# Altium PCB CartReader_1.0_Minimal.PcbDoc
Units mm, origin at the board's own origin, x right, y up, seen from the top; angles counter-clockwise.
Board outline 82.8 x 50 mm, 2 copper layers (Top Layer, Bottom Layer), stack 1.62 mm thick; 58 components, 74 nets, 306 pads, 259 vias.
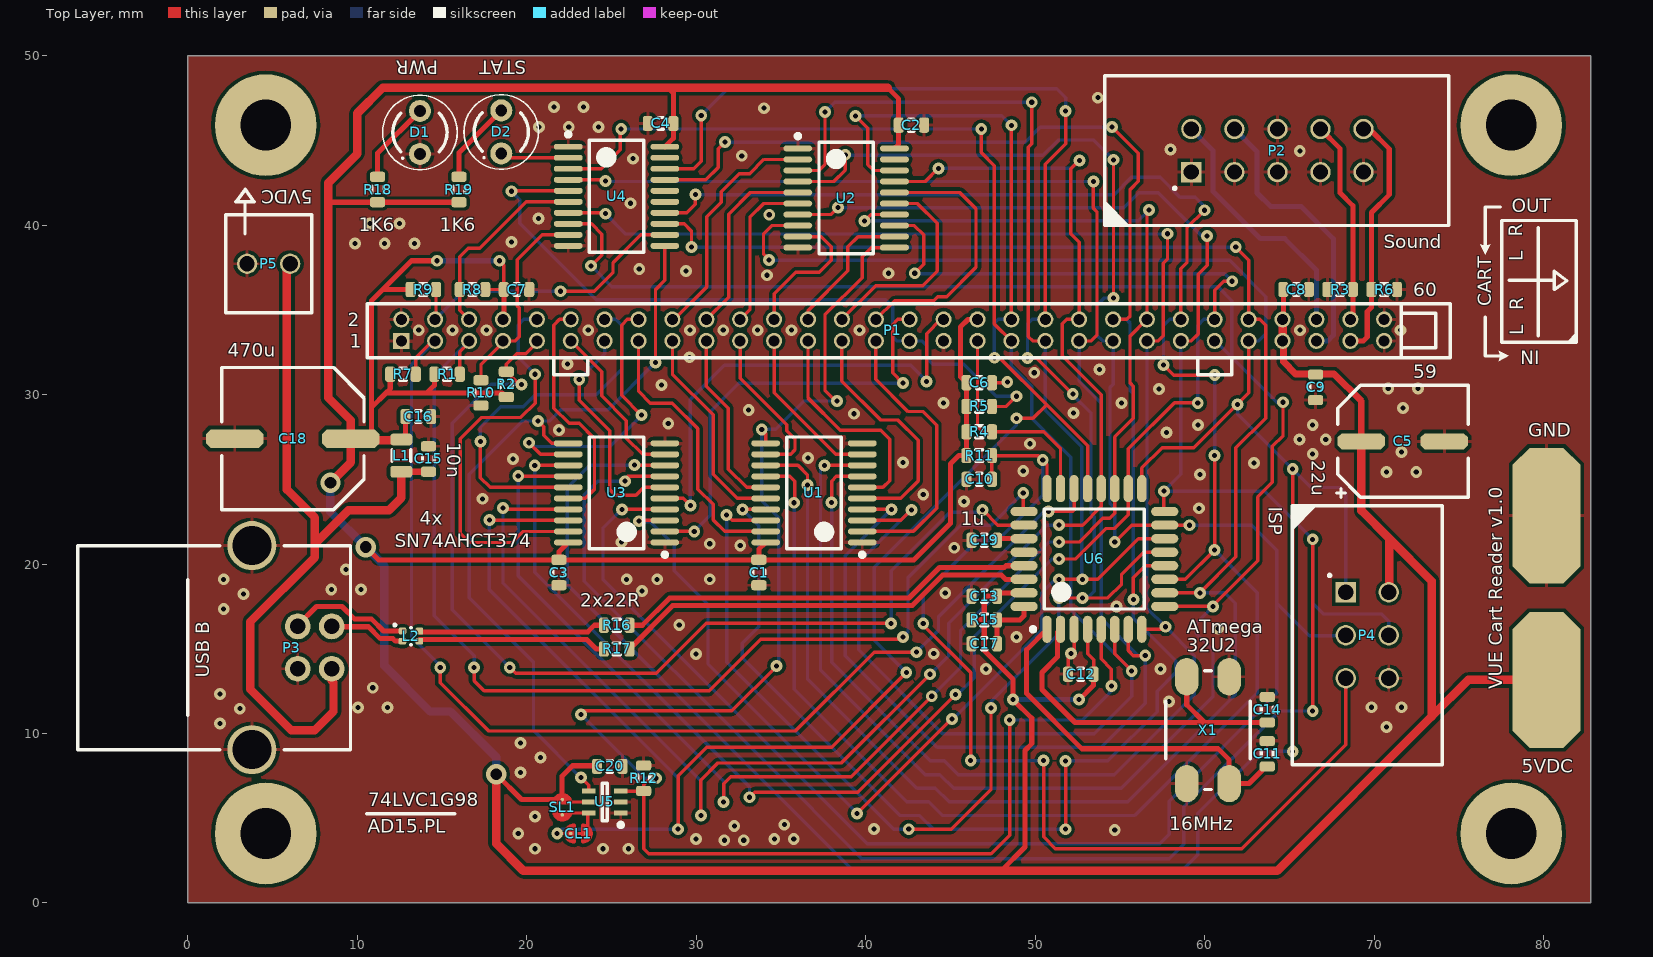
[diagram p0: Top Layer view]
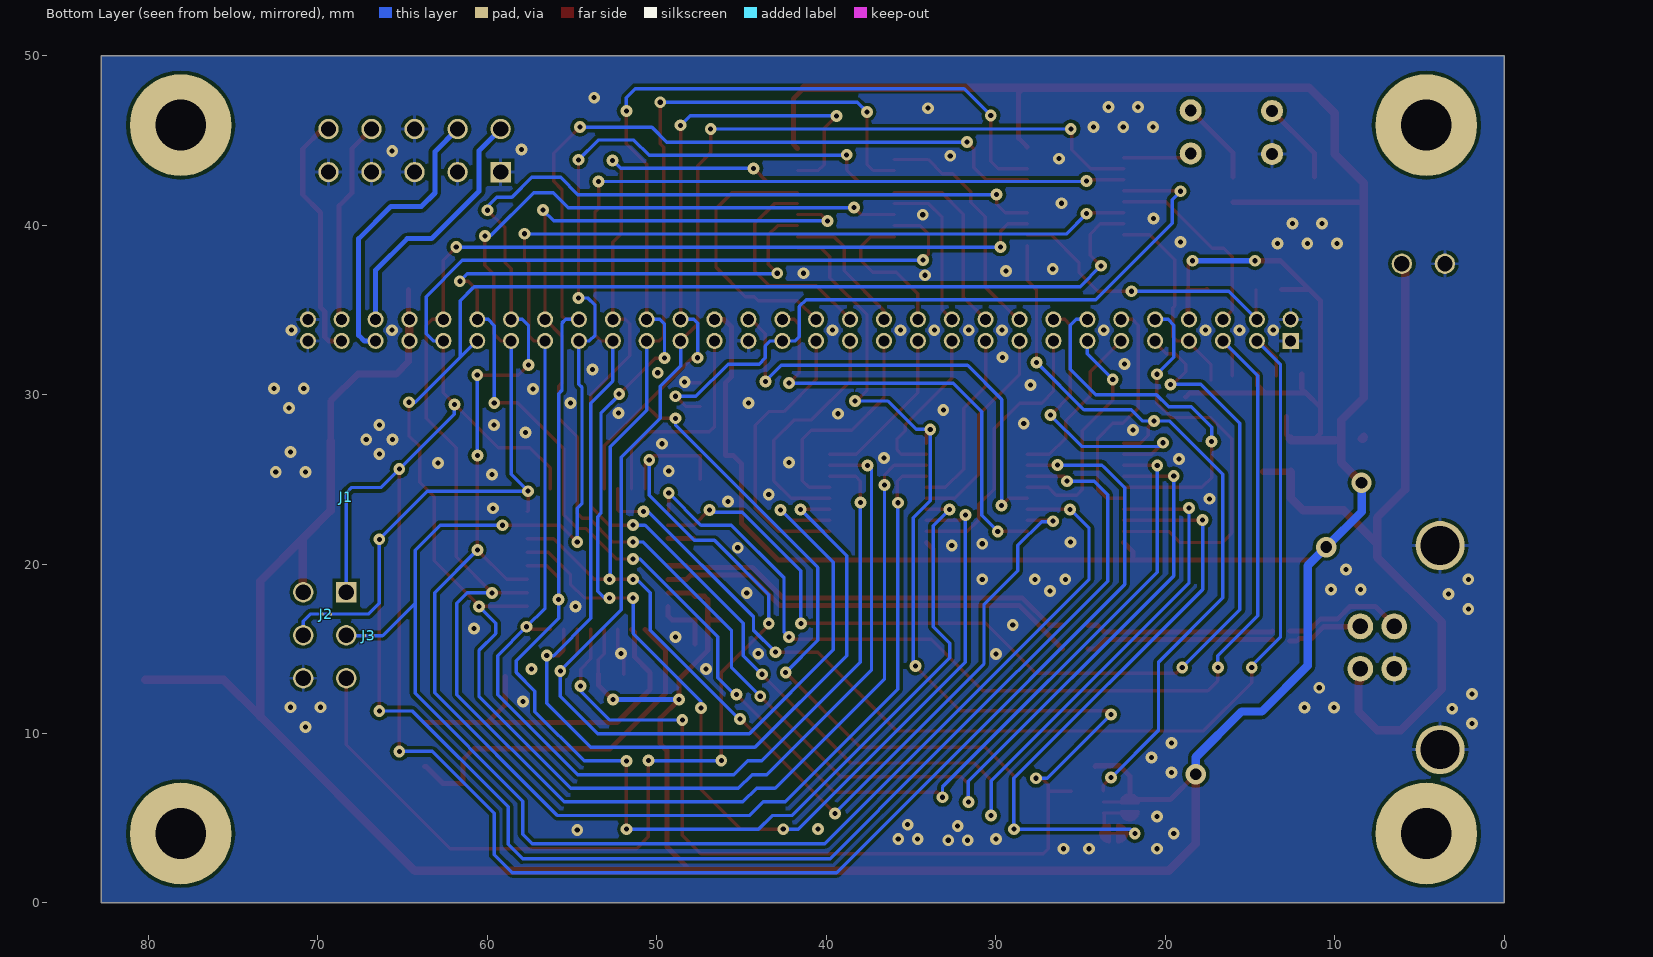
[diagram p1: Bottom Layer view, seen from below]

## Layer stack, top to bottom
Top Layer: signal copper 0.035
Dielectric: core 1.55, FR-4, Dk 4.8
Bottom Layer: signal copper 0.035

## Board outline
0,0 0,50 82.8,50 82.8,0

## Design rules (kind name [scope] priority, off if disabled: settings)
Clearance PolyClearance [IsRegion] p1: gap=0.2
Clearance DiffClearance [All] p2: gap=0.15
Clearance [All] p3: gap=0.2
ComponentClearance NetTie_Clearance [IsNetTieComponent] p1: gap=0 collisioncheckmode=3 verticalgap=0 showdistances=FALSE
ComponentClearance [All] p2: gap=0.2 collisioncheckmode=3 verticalgap=0.2 showdistances=FALSE
DiffPairsRouting [All] p1: maxlimit=0.2 minlimit=0.15 mostfreqgap=0.15 maxuncoupledlength=10
HoleSize PreferredHoleSize [All] p1: absolutevalues=TRUE maxlimit=5.5 minlimit=0.3 maxpercent=80.000 minpercent=20.000
HoleSize [All] p2: absolutevalues=TRUE maxlimit=5.5 minlimit=0.2 maxpercent=80.000 minpercent=20.000
HoleToHoleClearance HoleToHoleClearance_lt20 [HoleDiameter <= 2.0 vs HoleDiameter <= 2.0] p1: gap=0.4 allowstackedmicrovias=TRUE
HoleToHoleClearance HoleToHoleClearance_gt20 [All vs HoleDiameter > 2.0] p2: gap=0.5 allowstackedmicrovias=TRUE
MatchedLengths [IsDifferentialPair] p1: tolerance=1 checknetsindiffpair=TRUE checkdiffpairvsdiffpair=FALSE checkothers=TRUE
MinimumAnnularRing MinimumAnnularRing_Fix [All] p1: minimumring=0.15
MinimumAnnularRing [All] p2: minimumring=0.2
MinimumSolderMaskSliver [All] p1: minsoldermaskwidth=0.1
PlaneClearance [All] p1: clearance=0.5
PlaneConnect [All] p1: planeconnectstyle=Relief reliefexpansion=0.5 reliefentries=2 reliefconductorwidth=0.2 reliefairgap=0.2
PolygonConnect Power_VIAs [IsVia and InNetClass('PWR') and SolderMaskTentingBottom and SolderMaskTentingTop] p1: connectstyle=Direct reliefconductorwidth=0.254 reliefentries=4 polygonreliefangle="90 Angle" airgapwidth=0.254
PolygonConnect [All] p2: connectstyle=Relief reliefconductorwidth=0.2 reliefentries=4 polygonreliefangle="90 Angle" airgapwidth=0.2
RoutingCorners [All] p1: cornerstyle=45-Degree minsetback=2 maxsetback=2
RoutingVias [All] p1: holewidth=0.3 width=0.7 viastyle="Through Hole" minholewidth=0.2 minwidth=0.6 maxholewidth=5.5 maxwidth=5.9
SilkToSilkClearance [All] p1: silktosilkclearance=0.2
SilkscreenOverComponentPads [All] p1: minsilkscreentomaskgap=0.2
SolderMaskExpansion [All] p1: expansion=0.1
Width Width_PWR [InNetClass('PWR')] p1: maxlimit=0.5 minlimit=0.2 preferedwidth=0.3
Width [All] p2: maxlimit=0.4 minlimit=0.2 preferedwidth=0.2
18 further rules are at their usual default settings.

## Classes and differential pairs
component class System: C10 C11 C12 C13 C14 C15 C16 C17 C18 C19 C20 CL1 D1 D2 J1 J2 J3 L1 L2 P3 P4 P5 R11 R12 R15 R16 R17 R18 R19 SL1 U5 U6 X1
component class VUE_Connector: C1 C2 C3 C4 C5 C6 C7 C8 C9 P1 P2 R1 R2 R3 R4 R5 R6 R7 R8 R9 R10 U1 U2 U3 U4
net class PWR: GND NetC17_2 VBUS VCC5
differential pair D_IN_CHOKE: +D_IN_CHOKE_P -D_IN_CHOKE_N
differential pair D_IN: +D_IN_P -D_IN_N
differential pair D: +D_P -D_N

## Components (designator, comment, footprint, x,y, rotation, side; value= is the part's Value field where it differs from the comment)
C1 "100n" C0603 33.7,19.5 r90 top
C2 "100n" C0603 42.7,45.9 r180 top
C3 "100n" C0603 21.9,19.5 r90 top
C4 "100n" C0603 27.9,46 r0 top
C5 "22uF" CAPE66X66 71.7,27.24 r90 top
C6 "100n" C0603 46.7,30.7 r180 top
C7 "100n" C0603 19.4,36.2 r180 top
C8 "100n" C0603 65.4,36.2 r180 top
C9 "100n" C0603 66.55,30.43 r90 top
C10 "100n" C0603 46.7,25 r0 top
C11 "22p" C0603 63.7,8.8 r270 top
C12 "100n" C0603 52.7,13.5 r0 top
C13 "100n" C0603 47,18.1 r0 top
C14 "22p" C0603 63.7,11.4 r270 top
C15 "10n" C0603 14.2,26.2 r270 top
C16 "100n" C0603 13.6,28.7 r180 top
C17 "100n" C0603 47,15.3 r0 top
C18 "470u" C8.3x8.3mm 6.2,27.4 r270 top
C19 "1u" C0603 47,21.4 r0 top
C20 "100n" C0603 24.9,8.06 r180 top
CL1 "Cuttable Link" CuttableLink 23.3,4.1 r180 top net-tie
D1 "L-934LG" L-934LX 13.7,45.47 r90 top
D2 "L-934LI" L-934LX 18.5,45.5 r90 top
J1 "0.2mm" NETTIE_02MM 68.34,23.69 r90 bottom net-tie
J2 "0.2mm" NETTIE_02MM 69.76,17.05 r180 bottom net-tie
J3 "0.2mm" NETTIE_02MM 67.26,15.78 r180 bottom net-tie
L1 "BMB2A1000LN2" IND0805 12.6,26.4 r90 top
L2 "DLP11SN900HL2L" 0504 13.17,15.75 r0 top
P1 "GEC_RECEPTABLE" GEC_RECEPTACLE 41.6,33.8 r0 top
P2 "Header 2x5" GARRY_WSL-XG-10 64.3,44.4 r0 top
P3 "USB B Socket" USB_B_SOCKET 1.57,15.07 r270 top
P4 "Header 2x3" GARRY_WSL-XG-6 69.6,15.8 r270 top
P5 "Header 1x2" IMP_PSS254/2G 4.77,37.72 r180 top
R1 "open" R0603 15.3,31.2 r180 top
R2 "10k" R0603 18.8,30.6 r270 top
R3 "10k" R0603 68,36.2 r0 top
R4 "open" R0603 46.7,27.8 r180 top
R5 "10k" R0603 46.7,29.3 r180 top
R6 "10k" R0603 70.6,36.2 r180 top
R7 "10k" R0603 12.7,31.2 r180 top
R8 "open" R0603 16.8,36.2 r0 top
R9 "open" R0603 13.9,36.2 r180 top
R10 "10k" R0603 17.3,30.1 r90 top
R11 "10k" R0603 46.7,26.4 r180 top
R12 "10k" R0603 26.9,7.36 r270 top
R15 "10k" R0603 47,16.7 r180 top
R16 "22R" R0603 25.31,16.39 r180 top
R17 "22R" R0603 25.31,14.99 r180 top
R18 "1k6" R0603 11.2,42.1 r270 top
R19 "1k6" R0603 16,42.1 r270 top
SL1 "Solderable Link" SolderableLink 22.1,5.4 r90 top
U1 "SN74AHCT374PW" TSOP65P640X120-20N 36.95,24.2 r180 top
U2 "SN74AHCT374PW" TSOP65P640X120-20N 38.85,41.6 r0 top
U3 "SN74AHCT374PW" TSOP65P640X120-20N 25.3,24.2 r180 top
U4 "SN74AHCT374PW" TSOP65P640X120-20N 25.3,41.7 r0 top
U5 "74LVC1G98DW-7" SOT65P210X110-6N 24.6,5.96 r180 top
U6 "ATmega32U2" TQFP80P900X900X120-32N 53.5,20.3 r90 top
X1 "16 MHz" OSCC700X500X120A 60.2,10.2 r90 top

## Footprints (in the part's own frame and the unit in brackets; to place one, negate y for a bottom-side part, rotate by r counter-clockwise, add the part's x,y. Pads: shape width x height; smd on the part's side, far side on the other; paste and mask are expansions set on the pad)
0504 [mm] "Choke1210x90"
  rrect50% 0.45x0.4 smd: 1(-0.5,0.3) 2(0.5,0.3) 3(0.5,-0.3) 4(-0.5,-0.3)
  silkscreen extent -1,-0.5 0.01,0.7, body extent -0.6,-0.5 0.6,0.5, height 0.9
C8.3x8.3mm [mm] "CAPAE80X80"
  oct 1.1x3.4 smd: 1(0,3.425) 2(0,-3.425)
  silkscreen extent -4.2,-4.2 4.2,4.2, body extent -4.23,-4.23 4.25,4.2, height 10.7
C0603 [mm] "CAPC1608X90 - Original Description: Chip Capacitor; Body 1.0 x 0.5 mm [0603]"
  rrect50% 0.6x0.9 smd: 1(-0.75,0) 2(0.75,0)
  silkscreen extent -0.15,-0.35 0.15,0.35, body extent -0.8,-0.4 0.8,0.4, height 0.9
CAPE66X66 [mm]
  oct 0.95x2.8 smd: 1(0,2.45) 2(0,-2.45)
  silkscreen extent -3.3,-3.86 3.3,3.9, body extent -3.3,-3.86 3.3,3.85, height 5.5
CuttableLink [mm]
  round 0.2 smd paste-0.1: 1(-0.2,0) 2(0.7,0)
  Top Layer region: 0.5,0.5 0.717,0.45 0.891,0.312 0.987,0.111 0.987,-0.111 0.891,-0.312 0.717,-0.45 0.5,-0.5 0.5,-0.5
  Top Layer region: 0,-0.5 -0.217,-0.45 -0.391,-0.312 -0.487,-0.111 -0.487,0.111 -0.391,0.312 -0.217,0.45 0,0.5 0,0.5
  Top Layer lines w0.2: 0.5,0 0,0 ; 0.5,0.5 cw(c0.5,0) 0.5,-0.5 0.5,0.5 ; 0,0.5 ccw(c0,0) 0,-0.5 0,0.5
GARRY_WSL-XG-6 [mm]
  rect 1.2x1.2 hole 0.9: 1(-2.54,-1.27)
  round 1.2 hole 0.9: 2(-2.54,1.27) 3(0,-1.27) 4(0,1.27) 5(2.54,-1.27) 6(2.54,1.27)
  silkscreen extent -7.64,-4.43 7.64,4.43, body extent -7.6,-4.4 7.6,4.4, height 10.2
GARRY_WSL-XG-10 [mm]
  rect 1.2x1.2 hole 0.9: 1(-5.08,-1.27)
  round 1.2 hole 0.9: 2(-5.08,1.27) 3(-2.54,-1.27) 4(-2.54,1.27) 5(0,-1.27) 6(0,1.27) 7(2.54,-1.27) 8(2.54,1.27) 9(5.08,-1.27) 10(5.08,1.27)
  silkscreen extent -10.18,-4.43 10.1,4.43, body extent -10.18,-4.43 10.1,4.43, height 10.2
GEC_RECEPTACLE [mm]
  rect 0.95x0.95 hole 0.65: 1(-29,-0.635)
  round 0.95 hole 0.65: 2(-29,0.635) 3(-27,-0.635) 4(-27,0.635) 5(-25,-0.635) 6(-25,0.635) 7(-23,-0.635) 8(-23,0.635) 9(-21,-0.635) 10(-21,0.635) 11(-19,-0.635) 12(-19,0.635) 13(-17,-0.635) 14(-17,0.635) 15(-15,-0.635) 16(-15,0.635) 17(-13,-0.635) 18(-13,0.635) 19(-11,-0.635) 20(-11,0.635) 21(-9,-0.635) 22(-9,0.635) 23(-7,-0.635) 24(-7,0.635) 25(-5,-0.635) 26(-5,0.635) 27(-3,-0.635) 28(-3,0.635) 29(-1,-0.635) 30(-1,0.635) 31(1,-0.635) 32(1,0.635) 33(3,-0.635) 34(3,0.635) 35(5,-0.635) 36(5,0.635) 37(7,-0.635) 38(7,0.635) 39(9,-0.635) 40(9,0.635) 41(11,-0.635) 42(11,0.635) 43(13,-0.635) 44(13,0.635) 45(15,-0.635) 46(15,0.635) 47(17,-0.635) 48(17,0.635) 49(19,-0.635) 50(19,0.635) 51(21,-0.635) 52(21,0.635) 53(23,-0.635) 54(23,0.635) 55(25,-0.635) 56(25,0.635) 57(27,-0.635) 58(27,0.635) 59(29,-0.635) 60(29,0.635)
  silkscreen extent -31,-2.64 32.9,1.57, body extent -31,-1.64 30,1.57, height 7.1
IMP_PSS254/2G [mm]
  round 1.2 hole 0.9: 1(-1.27,0) 2(1.27,0)
  silkscreen extent -2.54,-2.9 2.54,2.9, body extent -2.54,-2.9 2.54,2.9, height 10.9
IND0805 [mm] "INDC2012X135 - Original Description: Inductor; Body 2.0 x 1.2 mm [0805]"
  rrect50% 0.7x1.3 smd: 1(-0.95,0) 2(0.95,0)
  silkscreen extent -0.35,-0.55 0.35,0.55, body extent -1,-0.65 1,0.65, height 1.05
L-934LX [mm]
  round 1.3 hole 0.7: 1(-1.27,0) 2(1.27,0)
  silkscreen extent -2.2,-2.2 2.2,2.2
NETTIE_02MM [mm]
  round 0.2 smd paste+0 mask+0: 1(0,0) 2(0.5,0)
  Top Layer lines w0.2: 0,0 0.5,0
OSCC700X500X120A [mm]
  oval 2.2x1.4 smd: 1(-3.15,-1.25) 2(3.15,-1.25) 3(3.15,1.25) 4(-3.15,1.25)
  silkscreen extent -3.5,-2.5 3.5,2.5, body extent -3.5,-2.5 3.5,2.5, height 1.2
R0603 [mm] "RESC1608X55 - Original Description: Chip Resistor; Body 1.0 x 0.5 mm [0603]"
  rrect50% 0.6x0.9 smd: 1(-0.75,0) 2(0.75,0)
  silkscreen extent -0.2,-0.35 0.2,0.35, body extent -0.8,-0.4 0.8,0.4, height 0.55
SolderableLink [mm]
  round 0.2 smd paste-0.1: 1(-0.2,0) 2(0.7,0)
  Top Layer region: 0.5,0.5 0.717,0.45 0.891,0.312 0.987,0.111 0.987,-0.111 0.891,-0.312 0.717,-0.45 0.5,-0.5 0.5,-0.5
  Top Layer region: 0,-0.5 -0.217,-0.45 -0.391,-0.312 -0.487,-0.111 -0.487,0.111 -0.391,0.312 -0.217,0.45 0,0.5 0,0.5
  Top Layer lines w0.2: 0,0.5 ccw(c0,0) -0.09,-0.492 ccw(c0,0) 0,-0.5 0,0 0,0.5 ; 0.5,0.5 cw(c0.5,0) 0.7,0.458 cw(c0.5,0) 1,0.01 cw(c0.5,0) 1,0 cw(c0.5,0) 0.56,-0.496 cw(c0.5,0) 0.5,-0.5 0.5,0 0.5,0.5
SOT65P210X110-6N [mm] "SOT363, 6-Leads, Body 2.2x2.2mm (max), Pitch 0.65mm, IPC Medium Density"
  rect 0.8x0.3 smd: 1(-0.95,0.65) 2(-0.95,0) 3(-0.95,-0.65) 4(0.95,-0.65) 5(0.95,0) 6(0.95,0.65)
  silkscreen extent -1.08,-1.1 0.15,1.47, body extent -0.67,-1.1 0.67,1.1, height 1.1
TQFP80P900X900X120-32N [mm] "TQFP, 32-Leads, Body 9.0x9.0mm (max), Pitch 0.80mm, IPC Medium Density"
  oval 1.6x0.55 smd: 1(-4.15,2.8) 2(-4.15,2) 3(-4.15,1.2) 4(-4.15,0.4) 5(-4.15,-0.4) 6(-4.15,-1.2) 7(-4.15,-2) 8(-4.15,-2.8) 17(4.15,-2.8) 18(4.15,-2) 19(4.15,-1.2) 20(4.15,-0.4) 21(4.15,0.4) 22(4.15,1.2) 23(4.15,2) 24(4.15,2.8)
  oval 0.55x1.6 smd: 9(-2.8,-4.15) 10(-2,-4.15) 11(-1.2,-4.15) 12(-0.4,-4.15) 13(0.4,-4.15) 14(1.2,-4.15) 15(2,-4.15) 16(2.8,-4.15) 25(2.8,4.15) 26(2,4.15) 27(1.2,4.15) 28(0.4,4.15) 29(-0.4,4.15) 30(-1.2,4.15) 31(-2,4.15) 32(-2.8,4.15)
  silkscreen extent -4.27,-2.95 2.95,3.75, body extent -3.5,-3.5 3.5,3.5, height 1.2
TSOP65P640X120-20N [mm] "TSOP, 20-Leads, Body 6.6x4.5mm (max), Pitch 0.65mm, IPC Medium Density"
  oval 1.7x0.35 smd: 1(-2.85,2.925) 2(-2.85,2.275) 3(-2.85,1.625) 4(-2.85,0.975) 5(-2.85,0.325) 6(-2.85,-0.325) 7(-2.85,-0.975) 8(-2.85,-1.625) 9(-2.85,-2.275) 10(-2.85,-2.925) 11(2.85,-2.925) 12(2.85,-2.275) 13(2.85,-1.625) 14(2.85,-0.975) 15(2.85,-0.325) 16(2.85,0.325) 17(2.85,0.975) 18(2.85,1.625) 19(2.85,2.275) 20(2.85,2.925)
  silkscreen extent -2.98,-3.3 1.6,3.77, body extent -2.25,-3.3 2.25,3.3, height 1.2
USB_B_SOCKET [mm]
  round 2.9 hole 2.3: 0(-6.02,2.213) 0(6.02,2.213)
  round 1.52 hole 0.92: 1(1.25,6.923) 2(-1.25,6.923) 3(-1.25,4.922) 4(1.25,4.922)
  silkscreen extent -6.02,-8.07 6.02,8.03

## Part data
C1 C2 C3 C4 C6 C7 C8 C9 C10 C12 C13 C16 C17 C20: library part 1168, "Ceramic Chip Capacitor"
C5: library part 1001
C11 C14: library part 1146, "Ceramic Chip Capacitor"
C15: library part 1162, "Ceramic Chip Capacitor"
C18: library part 1210, "Aluminum Electrolytic Capacitors"
C19: library part 1070, "Ceramic Chip Capacitor"
CL1: library part CuttableLink
D1: library part 3000, "Green Low-Current LED"
D2: library part 3002, "Red Low-Current LED"
J1 J2 J3: library part 6000
L1: library part 3003, "Chip Ferrit Bead Impedanz 1k"
L2: library part 3030, "SMD Common Mode Choke Coil"
P1: "VUE GEC_RECEPTABLE"
P2: library part 2008, "Shrouded Header 2x5"
P3: library part 2000
P4: library part 2005, "AVR In-System-Program Header 2x3"
P5: library part 2010, "Crimp Header Straight"
R1 R2 R3 R4 R5 R6 R7 R8 R9 R10 R11 R12 R15: library part 2471, "Resistor"
R16 R17: library part 2407, "Resistor"
R18 R19: library part 2452, "Resistor"
SL1: library part SolderableLink
U1 U2 U3 U4: library part 4003, "8x D Flip Flop w/ OE_N"
U5: library part 4004, "Configurable Multi-Function Logic Gate"
U6: library part 4001, "8-Bit AVR MCU,32KB Flash,USB Contr.,TQFP-32"
X1: library part 8000

## Free pads (board coordinates)
  round 6 hole 3: 0(4.6,4.1) 0(4.6,45.9) 0(78.1,4.1) 0(78.1,45.9)
  oct 4x8 smd mask-0.1: 0(80.18,13.16) 0(80.18,22.86)

## Via types
v1: diameter 0.7, hole 0.3, Top Layer to Bottom Layer, tented both sides, 256 vias
v2: diameter 1.2, hole 0.7, Top Layer to Bottom Layer, tented both sides, 3 vias

## Nets (pads, with @x,y where several pads share a name; then routed paths per layer and width w, separated by ;. In a path a pad name is that pad's centre, name@x,y a point inside that pad or via, vN(x,y) a via of type N, cw(c..) or ccw(c..) an arc to the next point about the centre after c; other vN are vias at no path point)
\ES: P1.4 R9.1 U4.12 | length 17.7
  Top Layer w0.2: P1.4 14.65,34.485 R9.1 ; v1(22,36.1) 23.975,36.1 25.094,37.219 25.094,37.794 26.725,39.425 U4.12
  Bottom Layer w0.2: P1.4 16.265,36.1 v1(22,36.1)
\INTCRO: P1.9 R2.1 U6.26 | length 61.5
  Top Layer w0.2: v1(19,13.9) 19.353,13.547 27.647,13.547 30.6,16.5 v1(41.5,16.5) ; v1(19.7,30.6) 19.55,30.6 R2.1 18.8,31.8 19.4,32.4 19.935,32.4 P1.9@20.6,33.065 ; v1(46.9,23.2) 47.8,22.3 U6.26
  Bottom Layer w0.2: v1(19,13.9) 15.6,17.3 15.6,28.3 17.9,30.6 v1(19.7,30.6) ; v1(41.5,16.5) 41.5,19.6 44.95,23.05 46.75,23.05 v1(46.9,23.2)
\OE: P1.35 R4.1 U6.23 | length 12.9
  Top Layer w0.2: P1.35 46.6,28.1 46.9,27.8 R4.1 50.5,27.8 51.5,26.8 U6.23
\PL: U3.11 U4.11 U5.4 | length 45.1
  Top Layer w0.2: v1(20.66,28.44) 21,28.1 21,27.6 21.475,27.125 U3.11 ; v1(23.2,7.4) 23.65,6.95 U5.4 ; v1(27.6,31.9) 27.6,36.2 28.15,36.75 U4.11
  Bottom Layer w0.2: v1(23.2,7.4) 20.4,10.2 20.4,14.2 16.6,18 16.6,25.3 19.74,28.44 v1(20.66,28.44) 21.34,28.44 22,29.1 24.8,29.1 v1(27.6,31.9)
\RAM_CS1: P1.6 R8.1 U4.6 | length 11.7
  Top Layer w0.2: P1.6 16.05,34.985 R8.1 16.05,38.125 16.55,38.625 17.225,38.625 19.975,41.375 U4.6
\RESET: C10.2 P4.5 R11.1 U6.24 | length 62.2
  Top Layer w0.2: v1(43.4,16.5) 43.4,16.4 46.2,13.6 v1(46.2,8.4) ; C10.2 R11.1 50.2,26.4 50.7,25.9 U6.24 ; v1(50.5,8.4) 50.5,3.9 51.2,3.2 62.2,3.2 68.33,9.33 P4.5
  Bottom Layer w0.2: v1(43.4,16.5) 43.4,18.2 46.6,21.4 47.8,21.4 50.45,24.05 v1(50.45,26.15) ; v1(46.2,8.4) v1(50.5,8.4)
\ROM_CE: P1.31 R5.1 U4.5 | length 42.2
  Top Layer w0.2: v1(19.1,42) 19.125,42.025 U4.5 ; R5.1 48.3,29.3 v1(48.9,29.9)
  Bottom Layer w0.2: v1(19.1,42) 19.6,41.5 19.6,40.1 24.1,35.6 41.2,35.6 41.6,35.2 41.6,33.4 41.835,33.165 P1.31 43.305,33.165 43.6,32.87 43.6,32.165 43.965,31.8 45.8,31.8 47.7,29.9 v1(48.9,29.9)
\RST: P1.5 R1.1 U6.25 | length 64.6
  Top Layer w0.2: R1.1@16.05,31.1 16.05,32.515 P1.5@16.6,33.065 ; v1(16.9,13.9) 16.9,13.1 17.48,12.52 30.77,12.52 33.82,15.57 42.07,15.57 v1(42.2,15.7) ; v1(49.3,24.2) 49.3,23.15 U6.25
  Bottom Layer w0.2: P1.5 14.55,31.115 14.55,16.95 16.9,14.6 v1(16.9,13.9) ; v1(42.2,15.7) 42.5,16 42.5,19.2 45.6,22.3 47.4,22.3 v1(49.3,24.2)
\WE: P1.3 R7.1 U6.22 | length 69.6
  Top Layer w0.2: R7.1@13.45,31.1 13.45,32.17 14.345,33.065 P1.3@14.6,33.065 ; v1(14.9,13.9) 14.9,13 17.75,10.15 35.86,10.15 40.51,14.8 v1(43,14.8) ; v1(50.8,23.1) 52.2,23.1 52.3,23.2 U6.22
  Bottom Layer w0.2: P1.3 13.2,31.765 13.2,15.7 v1@14.9,14 ; v1(43,14.8) 44.3,16.1 44.3,16.9 50.5,23.1 v1(50.8,23.1)
A0: P1.29 U1.2 | length 16.9
  Top Layer w0.2: U1.2 42.825,21.925 44.2,23.3 44.2,28.2 43.4,29 42.5,29 40.6,30.9 P1.29
A1: P1.27 U1.5 | length 14.4
  Top Layer w0.2: P1.27 38.6,30.8 40.9,28.5 41.9,28.5 43.1,27.3 43.1,24.9 42.075,23.875 U1.5
A2: P1.25 U1.6 | length 13.4
  Top Layer w0.2: P1.25 36.6,29.8 38.5,27.9 40.9,27.9 41.425,27.375 41.425,24.925 41.025,24.525 U1.6
A3: P1.23 U1.9 | length 9.8
  Top Layer w0.2: P1.23 34.6,30.1 38.225,26.475 U1.9
A4: P1.21 U1.12 | length 9.6
  Top Layer w0.2: P1.21 32.6,30.96 35.35,28.21 35.35,27.87 35.83,27.39 35.83,26.73 35.575,26.475 U1.12
A5: P1.19 U1.15 | length 10.7
  Top Layer w0.2: P1.19 30.6,30.5 31.9,29.2 31.9,25.6 32.975,24.525 U1.15
A6: P1.17 U1.16 | length 12.5
  Top Layer w0.2: P1.17 28.6,31.2 31,28.8 31,25.3 32.425,23.875 U1.16
A7: P1.15 U1.19 | length 16.5
  Top Layer w0.2: P1.15 26.6,30.2 27.3,29.5 28.6,29.5 30.1,28 30.1,24.419 31,23.519 31,22.6 31.675,21.925 U1.19
A8: P1.18 U2.2 | length 14.1
  Top Layer w0.2: P1.18 28.71,34.435 30.625,36.35 30.625,40.5 31.469,41.344 31.469,41.969 32.531,43.031 33.156,43.031 34,43.875 U2.2
A9: P1.20 U2.5 | length 11.4
  Top Layer w0.2: P1.20 30.61,34.435 31.925,35.75 31.925,40.65 33.2,41.925 U2.5
A10: P1.22 U2.6 | length 9.4
  Top Layer w0.2: P1.22 33.175,35.01 33.175,40.475 33.975,41.275 U2.6
A11: P1.24 U2.9 | length 8.7
  Top Layer w0.2: P1.24 34.6,35.95 35.875,37.225 37.275,37.225 37.975,37.925 37.975,38.725 37.375,39.325 U2.9
A12: P1.26 U2.12 | length 8.3
  Top Layer w0.2: P1.26 36.6,34.95 38.95,37.3 38.95,38.725 39.55,39.325 U2.12
A13: P1.28 U2.15 | length 12.6
  Top Layer w0.2: P1.28 40.585,36.42 43.36,36.42 44.23,37.29 44.23,40.1 43.055,41.275 U2.15
A14: P1.30 U2.16 | length 15.9
  Top Layer w0.2: P1.30 41.705,35.54 44.01,35.54 44.25,35.78 44.79,35.78 46.51,37.5 46.51,40.98 45.565,41.925 U2.16
A15: P1.32 U3.2 | length 26.1
  Top Layer w0.2: U3.2 v1(29.885,21.925) ; v1(42.2,30.68) 41.59,31.29 41.59,34.12 41.905,34.435 P1.32
  Bottom Layer w0.2: v1(29.885,21.925) 30.83,22.87 30.83,29 32.51,30.68 v1(42.2,30.68)
A16: P1.34 U3.5 | length 27.3
  Top Layer w0.2: U3.5 29.245,23.875 v1(29.66,23.46) ; v1(43.6,30.78) 43.6,33.6 44.435,34.435 P1.34
  Bottom Layer w0.2: v1(29.66,23.46) 29.66,29.71 31.67,31.72 42.66,31.72 v1(43.6,30.78)
A17: P1.13 U3.6 | length 13.7
  Top Layer w0.2: v1(23.1,30.9) 23.1,29.666 24.89,27.876 24.89,24.4 25.22,24.07 26.45,24.07 26.905,24.525 U3.6
  Bottom Layer w0.2: v1(23.1,30.9) 24.6,32.4 P1.13
A18: P1.11 U3.9 | length 9.8
  Top Layer w0.2: P1.11 24.42,31.345 24.42,29.92 25.88,28.46 25.88,27.43 26.835,26.475 U3.9
A19: P1.16 U3.12 | length 17.1
  Top Layer w0.2: v1(20.13,27.16) 20.815,26.475 U3.12 ; P1.16 25.935,34.435 25.6,34.1 25.6,29.95 26.76,28.79 v1(26.78,28.79)
  Bottom Layer w0.2: v1(20.13,27.16) 20.35,26.94 24.93,26.94 v1(26.78,28.79)
A20: P1.14 U3.15 | length 21.9
  Top Layer w0.2: v1(17.27,27.23) 17.27,25.1 17.845,24.525 U3.15
  Bottom Layer w0.2: v1(17.27,27.23) 17.27,28.08 18.47,29.28 19.8,29.28 20.52,30 24.1,30 25.6,31.5 25.6,34.1 25.265,34.435 P1.14
A21: P1.12 U3.16 | length 13.9
  Top Layer w0.2: U3.16 23.455,23.875 24,24.42 24,27.4 23.1,28.3 22.5,28.3 21.6,29.2 21.6,34.1 21.935,34.435 P1.12
A22: P1.10 U3.19 | length 24
  Top Layer w0.2: v1(20.5,31.2) 20.5,29.5 19.65,28.65 17.34,28.65 16.08,27.39 16.08,21.83 16.64,21.27 19.12,21.27 19.77,21.92 22.445,21.92 U3.19
  Bottom Layer w0.2: v1(20.5,31.2) 19.5,32.2 19.5,34.1 19.835,34.435 P1.10
AD0: P1.37 U1.3 U4.3 U6.6 | length 97.9
  Top Layer w0.2: U4.3 24.4,43.325 25.525,44.45 v1@25.525,45.725 ; U1.3 42.075,22.575 v1(42.7,23.2) ; v1(46.825,45.675) 46.825,44.285 47.6,43.51 47.6,34.165 P1.37 ; U6.6 54.7,14.7 v1(55.7,13.7)
  Bottom Layer w0.2: v1(25.575,45.675) v1(46.825,45.675) ; v1(42.7,23.2) 39.6,20.1 39.6,14.934 44.534,10 ; 44.534,9.994 53.5,9.994 55.7,12.194 v1(55.7,13.7) 52.1,17.3 52.1,26.3 49.8,28.6 49.8,30.5 48.6,31.7 P1.37
AD1: P1.41 U1.4 U4.4 U6.7 | length 99.3
  Top Layer w0.2: U4.4 v1@24.575,42.675 ; U1.4 v1(41.525,23.225) ; P1.41 53.315,33.165 53.65,33.5 53.65,40.8 53.44,41.01 v1(53.44,42.57) ; U6.7 55.5,14.9 55.8,14.6 v1(56.5,14.6)
  Bottom Layer w0.2: v1@24.675,42.575 53.435,42.575 v1(53.44,42.57) ; v1(41.525,23.225) 38.8,20.5 38.8,14.6 44.211,9.189 53.894,9.189 56.5,11.797 v1(56.5,14.6) 56.1,14.6 53.9,16.8 53.9,29.5 52.6,30.8 P1.41
  other v1: 24.65,42.6
AD2: P1.45 U1.7 U4.7 U6.8 | length 105.3
  Top Layer w0.2: U4.7 24.6,40.725 v1(24.65,40.675) ; v1(37.99,23.64) 37.99,24.89 38.275,25.175 U1.7 ; U6.8 57.55,16.15 v1(57.7,16.3) ; P1.45 57.265,33.165 57.565,33.465 57.565,37.745 57.81,37.99 v1(57.81,39.49)
  Bottom Layer w0.2: v1(24.65,40.675) 25.85,39.475 57.795,39.475 v1(57.81,39.49) ; v1(37.99,23.64) 37.99,14.21 43.817,8.383 44.649,8.383 45.455,7.577 54.683,7.577 59.4,12.294 59.4,14.6 v1(57.7,16.3) 56.6,17.4 P1.45
AD3: P1.49 U1.8 U4.8 U6.9 | length 117.2
  Top Layer w0.2: U4.8 23.825,40.075 24.425,39.475 24.425,38.225 v1(23.8,37.6) ; v1(37.575,25.825) U1.8 ; U6.9 v1@60.44,17.5 ; v1@60.47,17.53 63.13,20.19 63.13,23.96 64,24.83 64,26.95 64.63,27.58 v1(64.63,29.55)
  Bottom Layer w0.2: v1(23.8,37.6) 25.025,36.375 60.774,36.375 60.859,36.29 61.6,35.55 61.6,32.2 ; v1@37.333,25.89 37.333,13.767 43.523,7.577 44.382,7.577 45.188,6.772 55.077,6.772 60.5,12.194 60.5,14.9 59.5,15.9 59.5,16.5 v1(60.5,17.5) ; P1.49 60.635,33.165 61.6,32.2 ; v1(64.63,29.55) 64.25,29.55 61.6,32.2
AD4: P1.52 U1.13 U4.13 U6.10 | length 113.3
  Top Layer w0.2: U4.13 29.3,40.075 29.725,39.65 v1(29.725,38.715) v1@29.725,38.7 ; U1.13 36.008,25.825 36.567,25.267 v1(36.567,24.66) ; U6.10 v1(59.73,18.3) 61.85,20.42 61.85,26.86 63.6,28.61 63.6,34.1 63.265,34.435 P1.52 62.6,37.94 v1(61.84,38.7)
  Bottom Layer w0.2: v1@29.72,38.72 v1(29.725,38.715) ; v1@29.725,38.7 v1(61.84,38.7) ; v1(36.567,24.66) 36.567,13.233 43.028,6.772 44.115,6.772 44.921,5.966 55.472,5.966 61.8,12.294 61.8,17.7 61.2,18.3 v1(59.73,18.3)
AD5: P1.48 U1.14 U4.14 U6.11 | length 118.8
  Top Layer w0.2: U4.14 29.45,40.725 29.95,41.225 v1(29.95,41.8) ; U1.14 35.525,25.175 35.812,24.888 35.812,23.652 v1(35.78,23.62) ; v1(57.575,31.75) 58.175,31.15 v1(60.6,31.15) ; U6.11 58.86,19.1 v1(60.59,20.83) v1(60.59,26.41) ; P1.48 58.6,37.42 58.96,37.78 58.96,39.84 v1(60,40.88)
  Bottom Layer w0.2: v1(29.95,41.8) 54.66,41.8 55.68,42.82 57.38,42.82 58.55,41.65 59.44,41.65 60,41.09 v1(60,40.88) ; v1(35.78,23.62) 35.78,12.62 42.434,5.966 43.734,5.966 44.54,5.16 55.866,5.16 63.1,12.394 63.1,18.32 v1(60.59,20.83) ; v1(57.575,31.75) 57.575,34.075 57.935,34.435 P1.48 ; v1(60.59,26.41) 60.6,26.42 v1(60.6,31.15)
AD6: P1.44 U1.17 U4.17 U6.12 | length 115.3
  Top Layer w0.2: U4.17 30.575,42.675 31.3,43.4 31.3,44.5 v1(31.7,44.9) ; v1(32.725,23.225) U1.17 ; v1(51.8,4.355) v1(51.8,8.383) ; v1(54.54,45.78) 56.09,44.23 56.09,42.59 55.6,42.1 55.6,34.625 55.41,34.435 P1.44 ; v1(55.8,17.9) 55.8,19.2 56.5,19.9 U6.12
  Bottom Layer w0.2: v1(31.7,44.9) 49.41,44.9 50.29,45.78 v1(54.54,45.78) ; v1(32.725,23.225) 33.7,22.25 33.7,16.3 32.725,15.325 32.725,14.475 42.04,5.16 43.2,5.16 44.006,4.355 v1(51.8,4.355) ; v1(51.8,8.383) 54.289,8.383 57.2,11.294 57.2,12.5 58.3,13.6 58.3,14.3 55.8,16.8 v1(55.8,17.9) 55.8,30.05 55.6,30.25 55.6,34.225 55.39,34.435 P1.44
AD7: P1.40 U1.18 U4.18 U6.13 | length 113.2
  Top Layer w0.2: U4.18 29.85,43.325 30.3,43.775 v1(30.3,46.475) ; v1(31.8,22.9) 32.125,22.575 U1.18 ; v1(42.545,4.355) 45.055,4.355 47.4,6.7 v1(47.4,11.5) ; v1(49.55,32.15) 50.1,32.15 v1(52.225,30.025) ; P1.40 50.6,43.6 51.1,44.1 51.8,44.8 v1(51.8,46.74) ; v1(51.4,18) v1(52.8,18) 54.3,18 55.1,18.8 55.1,19.4 56.4,20.7 U6.13
  Bottom Layer w0.2: v1(30.3,46.475) 31.875,48.05 51.27,48.05 51.8,47.52 v1(51.8,46.74) ; v1(31.8,22.9) 31.8,14.2 41.645,4.355 v1(42.545,4.355) ; v1(47.4,11.5) 47.4,11.9 51.4,15.9 v1(51.4,18) ; v1(49.55,32.15) 49.55,34.15 49.835,34.435 P1.40 ; v1(52.225,30.025) 52.225,29.977 53.3,28.902 53.3,23 53.5,22.8 53.5,18.4 53.1,18 v1(52.8,18)
AD8: P1.39 U2.3 U3.3 U6.14 | length 97.9
  Top Layer w0.2: v1(26.63,22.53) 26.675,22.575 U3.3 ; U2.3 37.25,43.225 37.6,43.575 v1(37.6,46.675) ; v1@39.495,5.295 v1@45.07,10.87 ; v1(49.8,47.25) 49.8,44.8 49.6,44.6 49.6,33.425 49.86,33.165 P1.39 ; v1(51.4,19.1) v1(52.8,19.1) 53.7,19.1 56.1,21.5 U6.14
  Bottom Layer w0.2: v1@26.63,22.5 27.3,22.5 28.7,21.1 28.7,19.6 30.7,17.6 30.7,14.1 39.5,5.3 v1(39.5,5.29) ; v1(37.6,46.675) 38.175,47.25 v1(49.8,47.25) ; v1@45.12,10.82 50.4,16.1 50.4,18.3 51.2,19.1 v1(51.4,19.1) ; P1.39 50.6,29.075 52.75,26.925 v1@52.75,19.1
  other v1: 45.09,10.85
AD9: J3.2 P1.43 U2.4 U3.4 U6.15 | length 125.4
  Top Layer w0.2: v1(25.62,23.225) U3.4 ; U2.4 38.125,42.575 38.8,43.25 v1(38.8,44.15) ; v1(54.625,35.7) v1(54.625,43.855) ; v1(54.7,21.3) 55.7,22.3 U6.15 57.66,22.29 v1(59.11,22.29)
  Bottom Layer w0.2: v1(25.62,23.225) 24.5,22.105 24.5,19.1 34.406,9.194 ; 34.401,9.189 40.09,3.5 57.351,3.5 57.906,4.055 57.906,6.006 64.27,12.37 64.27,17.7 ; v1@38.8,44.125 50.46,44.125 51.355,45.02 53.46,45.02 v1(54.625,43.855) ; v1(54.625,35.7) 54.075,35.7 53.65,35.275 53.65,33.5 53.985,33.165 P1.43 54.6,30.6 54.417,30.417 54.417,23.582 54.7,23.3 v1(54.7,21.3) ; v1(59.11,22.29) 62.79,22.29 64.27,20.81 64.27,17.7 ; J3.2 66.19,15.78 64.27,17.7
AD10: J2.2 P1.47 U2.7 U3.7 U6.16 | length 135.2
  Top Layer w0.2: v1(25.81,24.89) 25.81,25.02 25.965,25.175 U3.7 ; U2.7 37.95,40.625 v1(38.375,41.05) ; v1(57.6,24.3) 57.6,23.15 U6.16 ; P1.47 59.215,33.165 59.625,33.575 59.625,37.105 60.15,37.63 v1(60.15,39.36) ; v1(66.38,11.329) v1(66.38,21.46)
  Bottom Layer w0.2: v1(25.81,24.89) 24.19,24.89 23.4,24.1 23.4,18.994 34.011,8.383 ; 34.007,8.383 39.78,2.61 57.92,2.61 58.78,3.47 58.78,5.674 64.435,11.329 v1(66.38,11.329) ; v1@38.375,41.025 55.24,41.025 56.115,41.9 57.28,41.9 v1@59.82,39.36 ; P1.47 58.6,25.3 v1(57.6,24.3) 63.54,24.3 v1(66.38,21.46) 66.38,17.69 67.02,17.05 J2.2
AD11: J1.2 P1.51 U2.8 U3.8 U6.17 | length 141.7
  Top Layer w0.2: v1(26.37,25.84) 28.135,25.84 U3.8 ; v1(34.3,37.95) 33.975,38.275 33.975,39.5 34.45,39.975 U2.8 ; U6.17 56.3,25.67 57.5,26.87 59.37,26.87 62.6,30.1 P1.51 ; v1(65.2,8.949) v1(65.2,25.6)
  Bottom Layer w0.2: v1(26.37,25.84) 23.74,25.84 23.6,25.7 22.4,24.5 22.4,18.794 33.617,7.577 ; 33.613,7.577 39.4,1.79 58.54,1.79 59.6,2.85 59.6,5.3 63.249,8.949 v1(65.2,8.949) ; v1@34.3,37.925 61.475,37.925 63.62,35.78 63.62,33.59 63.195,33.165 P1.51 ; v1(61.95,29.42) 61.95,28.83 66.26,24.52 68.01,24.52 J1.2
AD12: P1.50 U2.13 U3.13 U6.18 | length 98.7
  Top Layer w0.2: v1(20.475,25.825) U3.13 ; v1@33.15,6.24 33.45,6.54 39.54,6.54 v1(45.3,12.3) ; U2.13 42.875,39.975 43.425,39.425 43.425,37.685 v1(42.9,37.16) ; v1(51.4,20.3) 52.4,20.3 54.2,22.1 54.7,22.1 55.5,22.9 U6.18 55.5,26.8 58.225,29.525 59.575,29.525 v1(59.6,29.5) ; P1.50@60.59,34.445 60.59,36.16 61.12,36.69 v1(61.63,36.69)
  Bottom Layer w0.2: v1(20.475,25.825) 20.475,19.519 33.15,6.844 33.15,6.25 v1(33.14,6.24) ; v1@42.9,37.125 61.195,37.125 v1(61.63,36.69) ; v1(45.3,12.3) 45.4,12.3 46.4,13.3 46.4,15.7 51,20.3 v1(51.4,20.3) ; v1(59.6,29.5) 59.6,34.075 59.96,34.435 P1.50
AD13: P1.46 U2.14 U3.14 U6.19 | length 97.2
  Top Layer w0.2: v1(19.5,25.2) 19.525,25.175 U3.14 ; v1(31.618,5.966) 31.618,7.028 32.03,7.44 39.14,7.44 v1(43.9,12.2) ; v1(39.925,40.25) 40.3,40.625 U2.14 ; v1(51.4,21.3) 52.6,21.3 54,22.7 54.4,22.7 54.7,23 U6.19 54.7,27.5 55.8,28.6 55.8,30.5 55.6,30.7 55.6,33.435 P1.46 56.6,40.76 v1(56.73,40.89)
  Bottom Layer w0.2: v1(19.5,25.2) 19.5,19.294 31.618,7.176 v1(31.618,5.966) ; v1(39.925,40.25) 56.09,40.25 v1(56.73,40.89) ; v1(43.9,12.2) 45.6,13.9 45.6,16.1 50.8,21.3 v1(51.4,21.3)
AD14: P1.42 U2.17 U3.17 U6.20 | length 94.5
  Top Layer w0.2: v1(18.6,23.3) 18.675,23.225 U3.17 ; v1(30.275,5.16) 30.275,7.251 31.284,8.26 38.56,8.26 v1(43.8,13.5) ; U2.17@41.64,42.575 43.515,42.575 v1(44.29,43.35) ; v1(51.4,22.3) 52.8,22.3 53.9,23.4 U6.20 53.9,30 51.6,32.3 51.6,34.175 51.86,34.435 P1.42 52.6,39 52.1,39.5 52.1,43.32 v1@52.605,43.825 ; v1(52.61,43.82) v1@52.61,43.83
  Bottom Layer w0.2: v1(18.6,23.3) 18.6,18.9 30.275,7.225 v1(30.275,5.16) ; v1(43.8,13.5) 44.9,14.6 44.9,16.5 50.7,22.3 v1(51.4,22.3) ; v1@44.35,43.35 52.13,43.35 52.61,43.83 v1(52.61,43.82)
AD15: CL1.2 P1.38 U2.18 U3.18 U6.21 | length 115.2
  Top Layer w0.2: v1(17.8,22.6) 17.825,22.575 U3.18 ; v1(21.8,4.1) CL1.2 ; v1(28.932,4.355) 28.932,7.508 30.624,9.2 38,9.2 v1(42.4,13.6) ; v1(39.4,46.45) 40.125,45.725 40.125,43.575 40.475,43.225 U2.18 ; v1(47.6,32.175) 47.9,32.175 50.675,29.4 ; P1.38 v1(48.6,45.89) ; v1(48.9,28.6) 49.875,28.6 50.675,29.4 ; U6.21 53.1,26.975 50.675,29.4
  Bottom Layer w0.2: v1(17.8,22.6) 17.8,18.5 28.932,7.368 v1(28.932,4.355) 22.055,4.355 v1(21.8,4.1) ; v1(39.4,46.45) 48.04,46.45 v1(48.6,45.89) ; v1(42.4,13.6) 40.5,15.5 40.5,19.8 48.9,28.2 v1(48.9,28.6) ; v1(47.6,32.175) 47.6,34.2 47.835,34.435 P1.38
D_IN_CHOKE_N: L2.3 R17.2 | length 11.1
  Top Layer w0.3: L2.3@13.67,15.55 23.55,15.55 24.11,14.99 R17.2
D_IN_CHOKE_P: L2.2 R16.2 | length 11.1
  Top Layer w0.3: L2.2 13.72,16 23.6,16 23.99,16.39 R16.2
D_IN_N: L2.4 P3.2 | length 4.5
  Top Layer w0.3: P3.2@8.493,16.3 10.664,16.3 11.364,15.6 12.1,15.6 12.25,15.45 L2.4
D_IN_P: L2.1 P3.3 | length 7.3
  Top Layer w0.3: P3.3@6.456,16.356 7.6,17.5 9.1,17.5 9.85,16.75 10.85,16.75 11.55,16.05 L2.1
D_N: R17.1 U6.30 | length 25.2
  Top Layer w0.3: R17.1 28.62,17.55 42.75,17.55 44.55,19.35 48,19.35 48.25,19.1 U6.30
D_P: R16.1 U6.29 | length 24.7
  Top Layer w0.3: R16.1 26.824,16.39 28.434,18 42.564,18 44.364,19.8 48.186,19.8 48.286,19.9 U6.29
GND: C1.1 C2.1 C3.1 C4.1 C5.2 C6.1 C7.1 C8.1 C9.1 C10.1 C11.1 C12.1 C13.1 C14.1 C15.1 C16.1 C17.1 C18.2 C19.1 C20.1 D1.1 P1.1 P1.2 P1.33 P1.59 P1.60 P2.1 P2.3 P2.5 P2.6 P2.7 P2.9 P3.0 P3.4 P4.6 P5.2 pad.0@80.18,22.86 R3.1 R6.1 R10.1 R12.1 U1.1 U1.10 U2.1 U2.10 U3.1 U3.10 U4.1 U4.10 U5.1 U5.2 U6.3 U6.28 X1.2 X1.4 | length 3.5
  Top Layer w0.2: C6.1 48.31,30.7 v1(48.36,30.75) ; C12.1 v1@51.95,14.55 ; v1(52.125,14.725) 52.3,14.9 U6.3
  other v1: 20.5,3.2 24.5,3.2 26,3.2 31.66,3.7 32.81,3.7 30,3.77 34.61,3.77 35.76,3.77 19.5,4.1 54.7,4.3 40.5,4.37 32.25,4.55 35.2,4.62 20.5,5.1 19.64,7.7 20.81,8.575 19.64,9.45 70.735,10.38 1.9,10.59 3.07,11.465 10.04,11.53 11.79,11.53 69.86,11.55 71.61,11.55 57.9,11.9 1.9,12.34 10.915,12.7 47.1,13.8 57.4,13.8 30,14.7 44.02,14.71 48.9,15.7 60.8,16.2 29,16.4 2.12,17.35 54.8,17.5 3.29,18.225 44.7,18.3 26.8,18.4 8.47,18.5 10.22,18.5 2.12,19.1 25.9,19.1 27.7,19.1 30.8,19.1 9.345,19.67 45.23,20.96 32.6,21.1 30.8,21.2 25.6,21.29 59.68,23.29 45.8,23.7 17.4,23.85 43.4,24.1 59.72,25.28 70.74,25.44 72.49,25.44 49.3,25.5 62.92,25.97 42.2,26 19.2,26.2 36.6,26.25 66.38,26.49 71.615,26.61 49.7,27.1 65.61,27.345 67.15,27.345 57.75,27.77 21.9,27.9 59.62,28.2 66.38,28.2 28.35,28.29 39.32,28.87 52.27,28.91 33.1,29.09 71.715,29.2 44.6,29.5 55.1,29.5 57.32,30.33 70.84,30.37 72.59,30.37 27.96,30.57 49.95,31.29 53.79,31.48 22.4,31.8 29.6,32.2 13.63,33.8 15.63,33.8 17.63,33.8 23.63,33.8 29.63,33.8 31.6,33.8 33.63,33.8 35.63,33.8 39.63,33.8 65.63,33.8 71.57,33.8 34.18,37.04 41.34,37.16 29.4,37.3 26.64,37.42 9.87,38.925 11.62,38.925 13.37,38.925 19.1,39 10.745,40.095 12.495,40.095 20.7,40.4 34.31,40.61 26.12,41.29 26.27,43.92 32.69,44.09 65.62,44.38 58,44.47 20.73,45.8 22.48,45.8 24.23,45.8 34,46.9 21.605,46.97 23.355,46.97 53.7,47.52
LSND_IN: P1.56 P2.2 | length 15.1
  Bottom Layer w0.3: P2.2 60.5,44.39 60.5,42 63.3,39.2 64.735,39.2 66.6,37.335 P1.56
LSND_OUT: P1.58 P2.8 R3.2 | length 12.1
  Top Layer w0.3: P2.8 68,44.51 68,41.9 68.75,41.15 R3.2 68.75,34.585 P1.58
MISO: J1.1 P4.1 | length 5.4
  Bottom Layer w0.2: P4.1 68.34,18.35 J1.1
MOSI: J2.1 P4.4 | length 2.1
  Bottom Layer w0.2: J2.1 70.45,17.05 70.87,16.63 P4.4
NetC17_2: C17.2 R15.1 U6.32 | length 3.7
  Top Layer w0.3: C17.2 R15.1 49.1,16.7 49.35,16.95 U6.32
NetC19_2: C19.2 U6.27 | length 1.6
  Top Layer w0.2: C19.2 C19.2@47.85,21.5
  Top Layer w0.3: C19.2@47.85,21.5 U6.27
NetCL1_1: CL1.1 SL1.1 U5.6 | length 3.2
  Top Layer w0.2: 21.81,5.302 22.191,5.302 ; SL1.1 22.21,5.31 22.592,5.31 U5.6 23.6,5.26 23.6,4.1
NetD1_2: D1.2 R18.1 | length 4.9
  Top Layer w0.3: R18.1 11.2,44.239 D1.2
NetD2_2: D2.2 R19.1 | length 5
  Top Layer w0.3: R19.1 16,44.27 D2.2
PL: R12.2 U1.11 U2.11 U5.3 U6.5 | length 96.8
  Top Layer w0.2: v1(23.2,11.13) 23.41,11.34 32.11,11.34 v1(34.75,13.98) ; U5.3 25.56,6.6 R12.2@26.9,6.6 ; v1(27.64,7.36) 27.29,7.36 26.9,6.97 R12.2 R12.2@26.9,6.6 ; v1(33.87,27.95) 34.1,27.72 U1.11 ; v1(38.32,29.62) 38.24,29.62 37.6,30.26 37.6,34.7 39.8,36.9 39.8,38.14 40.335,38.675 U2.11 ; v1(48.5,10.8) 48.5,4 47.4,2.9 27.2,2.9 26.9,3.2 R12.2@26.9,6.6 ; U6.5 53.9,14.4 54.5,13.8 v1(54.5,12.8)
  Bottom Layer w0.2: v1(23.2,11.13) 26.97,7.36 v1(27.64,7.36) ; v1(34.75,13.98) 34.88,14.11 34.88,22.73 33.87,23.74 v1(33.87,27.95) 34.69,27.95 36.36,29.62 v1(38.32,29.62) ; v1@38.28,29.58 v1@38.31,29.55 ; v1(48.5,10.8) 49.4,10.8 52.8,10.8 54.5,12.5 v1(54.5,12.8)
RAM_CS2: P1.7 R10.2 U4.9 | length 12
  Top Layer w0.2: R10.2 17.3,31.765 P1.7@18.6,33.065 ; P1.7 19.315,33.165 19.55,33.4 19.55,35.125 19.45,35.225 19.45,37.95 20.925,39.425 U4.9
RSND_IN: P1.55 P2.4 | length 16.8
  Bottom Layer w0.3: P2.4 63.1,44.33 63.1,41.9 63.9,41.1 65.7,41.1 67.6,39.2 67.6,33.5 67.265,33.165 P1.55
RSND_OUT: P1.57 P2.10 R6.2 | length 14.7
  Top Layer w0.3: P1.57 69.365,33.165 69.6,33.4 69.6,34.9 69.85,35.15 R6.2 69.85,40.75 70.9,41.8 70.9,44.5 69.73,45.67 P2.10
SCK: J3.1 P4.3 | length 1.1
  Bottom Layer w0.2: J3.1 67.5,15.78 P4.3@68.34,15.78
STATUS: D2.1 U4.2 | length 4.1
  Top Layer w0.2: D2.1 18.755,43.975 U4.2
VBUS: C15.2 L1.1 P3.1 P5.1 | length 45
  Top Layer w0.4: L1.1 C15.2
  Top Layer w0.5: P5.1 5.85,37.53 5.85,24.39 7.5,22.74 7.5,20.4 3.7,16.6 3.7,12.6 6.1,10.2 7.5,10.2 8.6,11.3 8.6,13.013 P3.1@8.493,13.12 ; 7.5,21.2 9.475,23.175 11.875,23.175 12.6,23.9 L1.1
VCC5: C1.2 C2.2 C3.2 C4.2 C5.1 C6.2 C7.2 C8.2 C9.2 C12.2 C13.2 C16.2 C18.1 C20.2 L1.2 P1.8 P1.36 P1.53 P1.54 P4.2 pad.0@80.18,13.16 R1.2 R2.2 R4.2 R5.2 R7.2 R8.2 R9.2 R11.2 R15.2 R18.2 R19.2 SL1.2 U1.20 U2.20 U3.20 U4.20 U5.5 U6.4 U6.31 | length 327.3
  Top Layer w0.2: R8.2 C7.2 18.65,37.65 v1(18.4,37.9) ; 22.596,5.96 U5.5 ; U6.4 53.1,14.7 53.45,14.35 C12.2
  Top Layer w0.3: 8.3,41.4 8.35,41.35 R18.2 R19.2 ; C18.1@8.325,27.4 C18.1@8.4,27.325 ; v2(10.5,21) 11.25,20.25 C3.2 ; C18.1@11.2,27.35 10.85,27.7 10.85,29.25 ; R7.2 11.95,30.35 11.7,30.1 ; L1.2@12.6,27.3 L1.2 ; L1.2@12.6,27.4 12.85,27.65 C16.2 ; R9.2 11.5,36.2 ; R1.2 14.55,30.55 14.1,30.1 ; v1(14.7,37.9) 13.2,37.9 11.5,36.2 ; v2(18.2,7.6) 19.7,6.1 21.642,6.1 SL1.2 ; P1.8 18.65,34.485 C7.2 ; R2.2 18.55,30.1 14.1,30.1 ; 22.3,6.1 SL1.2 ; U3.20 21.9,20.725 C3.2 ; C20.2 24.11,8.1 22.7,8.1 22.09,7.49 22.09,6.4 22.09,6.11 SL1.2 ; U4.20 28.65,45.125 C4.2 28.65,47.8 28.35,48.1 ; U1.20 33.7,20.875 C1.2 ; 41.3,48.1 41.95,47.45 C2.2 41.95,44.775 U2.20 ; R15.2 46.8,16.7 47,16.9 ; P1.36 46.035,34.435 45.6,34 45.6,31.05 C6.2 R5.2 R4.2 R11.2 45.5,26.4 45,25.9 45,22.4 42.85,20.25 C1.2 ; 48,1.9 49.4,3.3 49.4,9 49.8,9.4 49.8,10.9 v1(48.7,12) 48.7,13.2 48.3,13.6 48.293,13.6 47,14.893 47,16.9 ; U6.31 47.95,18.3 C13.2 47.2,18.1 47,17.9 47,16.9 ; v1(52.6,12) 53.45,12.85 C12.2 ; P1.53 P1.53@64.65,33.115 ; P1.54@64.6,34.15 P1.54@64.65,34.1 ; P1.54@64.65,34.485 C8.2 ; 10.85,29.25 10.85,35.55 11.5,36.2 ; 10.85,29.25 11.7,30.1 ; 11.7,30.1 14.1,30.1 ; C3.2 C1.2
  Top Layer w0.4: P1.53@64.65,33.115 64.65,31.94 65.37,31.22 67.64,31.22 69.25,29.61 C5.1
  Top Layer w0.5: C18.1@8.3,27.5 8.4,27.4 C18.1@8.325,27.4 ; v2(8.42,24.8) 9.625,26.005 C18.1 9.625,28.475 8.3,29.8 8.3,41.4 8.3,42.5 10,44.2 10,46.6 11.5,48.1 28.35,48.1 41.3,48.1 ; C18.1@10,27.3 L1.2@12.6,27.3 ; L1.2@12.6,27.4 L1.2@12.65,27.4 ; v2(18.2,7.6) 18.2,3.5 19.8,1.9 48,1.9 64.3,1.9 73.4,11 ; P1.53 64.6,34.15 P1.54 ; C5.1 69.25,23.15 70.9,21.5 ; P4.2 70.9,18.37 70.9,21.5 ; pad.0@80.18,13.16 75.56,13.16 73.4,11 ; 70.9,21.5 73.4,19 73.4,11
  Bottom Layer w0.3: v1(14.7,37.9) v1(18.4,37.9) ; v1(48.7,12) v1(52.6,12)
  Bottom Layer w0.5: v2(8.42,24.8) 8.42,23.12 8.4,23.1 v2(10.5,21) 11.6,19.9 11.6,14 14.3,11.3 15.5,11.3 18.2,8.6 v2(18.2,7.6)
XIN: C11.2 U6.1 X1.1 | length 21.9
  Top Layer w0.3: U6.1 49.5,14.95 49.5,12.36 52.76,9.1 60.8,9.1 61.45,8.45 X1.1 62.62,7.05 63.62,8.05 C11.2
XOUT: C14.2 U6.2 X1.3 | length 21.2
  Top Layer w0.3: U6.2 51.325,15.975 51.325,14.525 50.4,13.6 50.4,12.6 52.35,10.65 60,10.65 ; X1.3 58.95,11.7 60,10.65 ; C14.2 60,10.65
pads on no net: U2.19 U4.15 U4.16 U4.19

## Polygon pours and split planes (outlines as drawn)
GND on Bottom Layer "BtmGND" (solid, remove dead copper, pour order 7): 0,50 82.77,50 82.77,0 0,0
GND on Top Layer "TopGND" (solid, remove dead copper, pour order 3): 0,50 82.79,50 82.79,0 0,0

## Silkscreen, mask and mechanical layers (free items; w line width, h text height)
Top Overlay:
  region: 81.36,33.09 81.94,33.67 81.94,33.09
  region: 77.35,32.6 77.96,32.29 77.35,31.98 77.44,32.28
  region: 76.86,38.87 76.57,38.26 76.26,38.87 76.56,38.78
  lines w0.2: 3.35,41.32 3.38,41.32 3.38,39.49 ; 10.55,5.27 15.75,5.27 ; 76.56,34.57 76.56,32.28 77.44,32.28 ; 76.56,38.78 76.56,41.07 77.44,41.07 ; 77.98,36.75 80.11,36.75 80.63,36.75 ; 79.7,33.46 79.7,39.85 ; 2.842,41.37 3.402,42.11 3.912,41.37 2.842,41.37 ; 77.54,33.09 81.94,33.09 81.94,40.27 77.54,40.27 77.54,33.09 ; 80.64,36.21 80.64,37.28 81.38,36.72 80.64,36.21
  text "PWR" at 14.766,49.69 h0.8 r180
  text "STAT" at 19.966,49.69 h0.8 r180
  text "5VDC" at 7.38,42.07 h0.8 r180
  text "OUT" at 78.14,40.75 h0.8
  text "1K6" at 10.09,39.65 h0.8
  text "1K6" at 14.87,39.65 h0.8
  text "R" at 78.75,39.32 h0.8 r90
  text "Sound" at 70.56,38.63 h0.8
  text "L" at 78.77,37.867 h0.8 r90
  text "60" at 72.3,35.8 h0.8
  text "CART" at 76.92,35.214 h0.8 r90
  text "R" at 78.8,34.963 h0.8 r90
  text "2" at 9.427,34.035 h0.8
  text "L" at 78.8,33.51 h0.8 r90
  text "1" at 9.56,32.765 h0.8
  text "IN" at 79.77,32.59 h0.8 r180
  text "470u" at 2.35,32.22 h0.8
  text "59" at 72.3,30.95 h0.8
  text "GND" at 79.114,27.5 h0.8
  text "10n" at 15.32,27.18 h0.8 r270
  text "22u" at 66.33,26.12 h0.8 r270
  text "ISP" at 63.8,23.39 h0.8 r270
  text "4x" at 13.7,22.32 h0.8
  text "1u" at 45.6,22.3 h0.8
  text "SN74AHCT374" at 12.21,21 h0.8
  text "2x22R" at 23.16,17.47 h0.8
  text "ATmega" at 58.95,15.93 h0.8
  text "32U2" at 58.95,14.82 h0.8
  text "USB B" at 1.28,13.29 h0.8 r90
  text "VUE Cart Reader v1.0" at 77.57,12.62 h0.8 r90
  text "5VDC" at 78.714,7.68 h0.8
  text "74LVC1G98" at 10.66,5.71 h0.8
  text "16MHz" at 57.91,4.3 h0.8
  text "AD15.PL" at 10.61,4.14 h0.8
Top Solder:
  lines w0.4: 22.8,4.12 23.39,4.12 ; 23.39,4.1 23.39,4.11
Mechanical 2:
  lines w0.45: 8.493,13.82 8.494,13.82 ; 12.6,25.45 12.601,25.45 ; 12.6,33.165 12.601,33.165 ; 12.67,16.05 12.671,16.05 ; 13.45,31.2 13.451,31.2 ; 13.7,44.2 13.701,44.2 ; 14.2,26.95 14.201,26.95 ; 14.35,28.7 14.351,28.7 ; 14.65,36.2 14.651,36.2 ; 16,42.85 16.001,42.85 ; 17.3,29.35 17.301,29.35 ; 18.5,44.23 18.501,44.23 ; 18.8,31.35 18.801,31.35 ; 20.15,36.2 20.151,36.2 ; 21.9,18.75 21.901,18.75 ; 22.1,5.2 22.101,5.2 ; 22.45,44.625 22.451,44.625 ; 23.5,4.1 23.501,4.1 ; 25.55,5.31 25.551,5.31 ; 26.06,14.99 26.061,14.99 ; 26.06,16.39 26.061,16.39 ; 26.9,8.11 26.901,8.11 ; 27.15,46 27.151,46 ; 28.15,21.275 28.151,21.275 ; 33.7,18.75 33.701,18.75 ; 36,44.525 36.001,44.525 ; 39.8,21.275 39.801,21.275 ; 43.45,45.9 43.451,45.9 ; 45.95,25 45.951,25 ; 46.25,15.3 46.251,15.3 ; 46.25,18.1 46.251,18.1 ; 46.25,21.4 46.251,21.4 ; 47.45,26.4 47.451,26.4 ; 47.45,27.8 47.451,27.8 ; 47.45,29.3 47.451,29.3 ; 47.45,30.7 47.451,30.7 ; 47.75,16.7 47.751,16.7 ; 50.7,16.15 50.701,16.15 ; 51.95,13.5 51.951,13.5 ; 63.7,9.55 63.701,9.55 ; 63.7,12.15 63.701,12.15 ; 66.15,36.2 66.151,36.2 ; 66.55,29.68 66.551,29.68 ; 68.33,18.34 68.331,18.34 ; 69.25,27.24 69.251,27.24 ; 71.35,36.2 71.351,36.2 ; 6.04,37.72 6.041,37.72 ; 9.625,27.4 9.626,27.4 ; 11.2,42.85 11.201,42.85 ; 16.05,31.2 16.051,31.2 ; 16.05,36.2 16.051,36.2 ; 25.65,8.06 25.651,8.06 ; 59.22,43.13 59.221,43.13 ; 61.45,7.05 61.451,7.05 ; 67.25,36.2 67.251,36.2
  text "C4" at 27.304,45.634 h1.14
  text "C2" at 42.112,45.533 h1.14
  text "D2" at 16.814,44.441 h3.3
  text "D1" at 12.191,44.39 h3.3
  text "P2" at 61.823,42.79 h5
  text "R18" at 11.607,41.139 h1.28 r90
  text "R19" at 16.407,41.139 h1.28 r90
  text "U4" at 22.732,40.275 h5
  text "U2" at 36.296,40.148 h5
  text "R9" at 13.309,35.83 h1.14
  text "R8" at 16.204,35.83 h1.14
  text "C7" at 18.795,35.83 h1.14
  text "C8" at 64.794,35.83 h1.14
  text "R3" at 67.411,35.83 h1.14
  text "R6" at 70.001,35.83 h1.14
  text "P5" at 6.222,35.449 h4.6 r90
  text "P1" at 41.122,32.249 h3.34
  text "R7" at 12.115,30.826 h1.14
  text "R1" at 14.782,30.826 h1.14
  text "C6" at 46.1,30.344 h1.14
  text "R2" at 19.455,29.582 h2 r90
  text "C9" at 67.182,29.378 h2 r90
  text "R10" at 17.703,29.124 h1.28 r90
  text "R5" at 46.1,28.947 h1.14
  text "C16" at 12.597,28.286 h1.28
  text "R4" at 46.125,27.423 h1.14
  text "R11" at 45.795,25.975 h1.28
  text "C18" at 2.285,25.848 h4.91
  text "C5" at 69.036,25.645 h5
  text "L1" at 13.385,25.467 h2.44 r90
  text "C15" at 14.604,25.213 h1.28 r90
  text "C10" at 45.719,24.603 h1.28
  text "U3" at 22.732,22.444 h5
  text "U1" at 34.67,22.444 h5
  text "C19" at 45.998,20.996 h1.28
  text "U6" at 50.926,18.71 h5
  text "C1" at 34.34,18.558 h2 r90
  text "C3" at 22.529,18.431 h2 r90
  text "C13" at 45.998,17.694 h1.28
  text "R15" at 46.024,16.297 h1.28
  text "R16" at 24.332,15.993 h1.28
  text "L2" at 12.623,15.383 h1.18
  text "C17" at 45.998,14.9 h1.28
  text "R17" at 24.332,14.57 h1.28
  text "P3" at -0.89,13.478 h5
  text "P4" at 71.221,13.351 h5 r90
  text "C12" at 51.713,13.097 h1.28
  text "C14" at 64.109,10.405 h1.28 r90
  text "X1" at 61.823,7.89 h5 r90
  text "C11" at 64.109,7.89 h1.28 r90
  text "C20" at 23.9,7.661 h1.28
  text "R12" at 27.304,6.391 h1.28 r90
  text "U5" at 23.342,5.096 h2.44
  text "SL1" at 22.427,4.969 h1 r90
  text "CL1" at 22.326,3.775 h1
Mechanical 3:
  lines w0.049: 67.26,15.78 67.261,15.78 ; 68.34,23.69 68.341,23.69 ; 69.76,17.05 69.761,17.05
  text "J1" at 68.02,23.562 h1 r270
  text "J2" at 69.951,16.729 h1
  text "J3" at 67.461,15.459 h1
Mechanical 14:
  the board outline again, w0.2
Drill Drawing:
  text ".LEGEND" at 85.39,0.19 h1.2

## Dimensions
0,0 to 82.8,0 on Mechanical 14
0,50 to 0,0 on Mechanical 14